# EAGLE board SensorBoards_Combined_Mask_20_01_2018 (EAGLE 8.5.2)
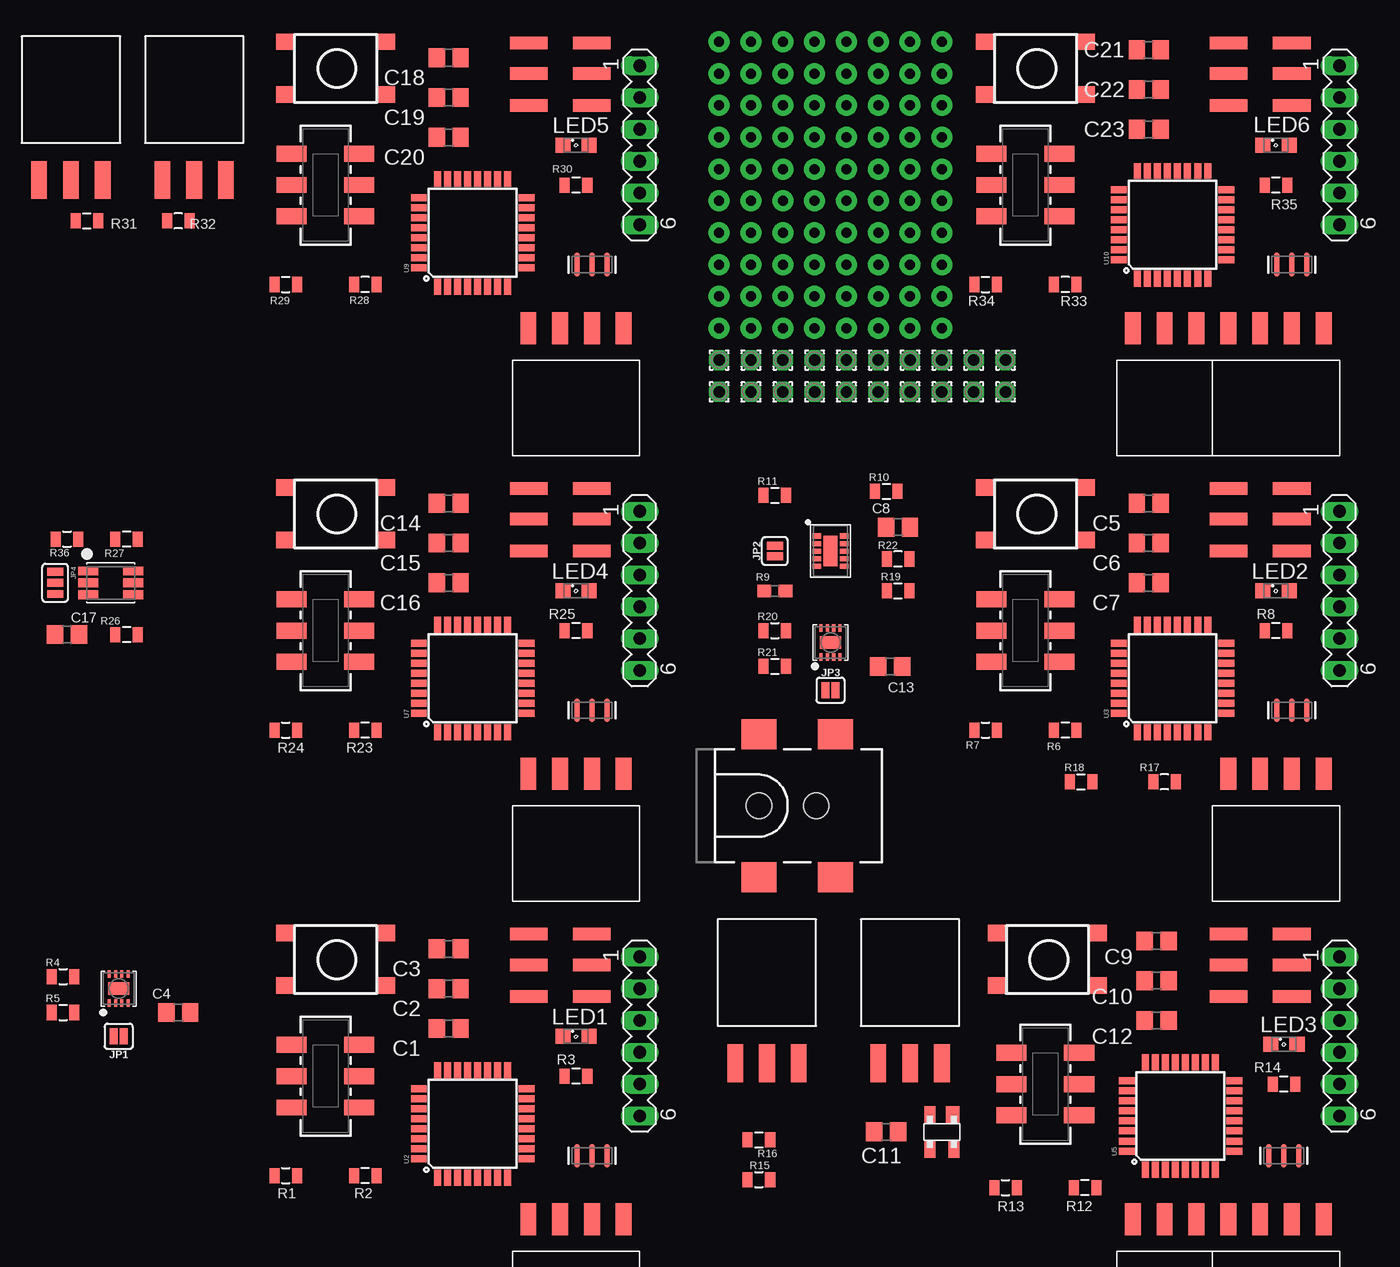
[diagram p0: board, top side]
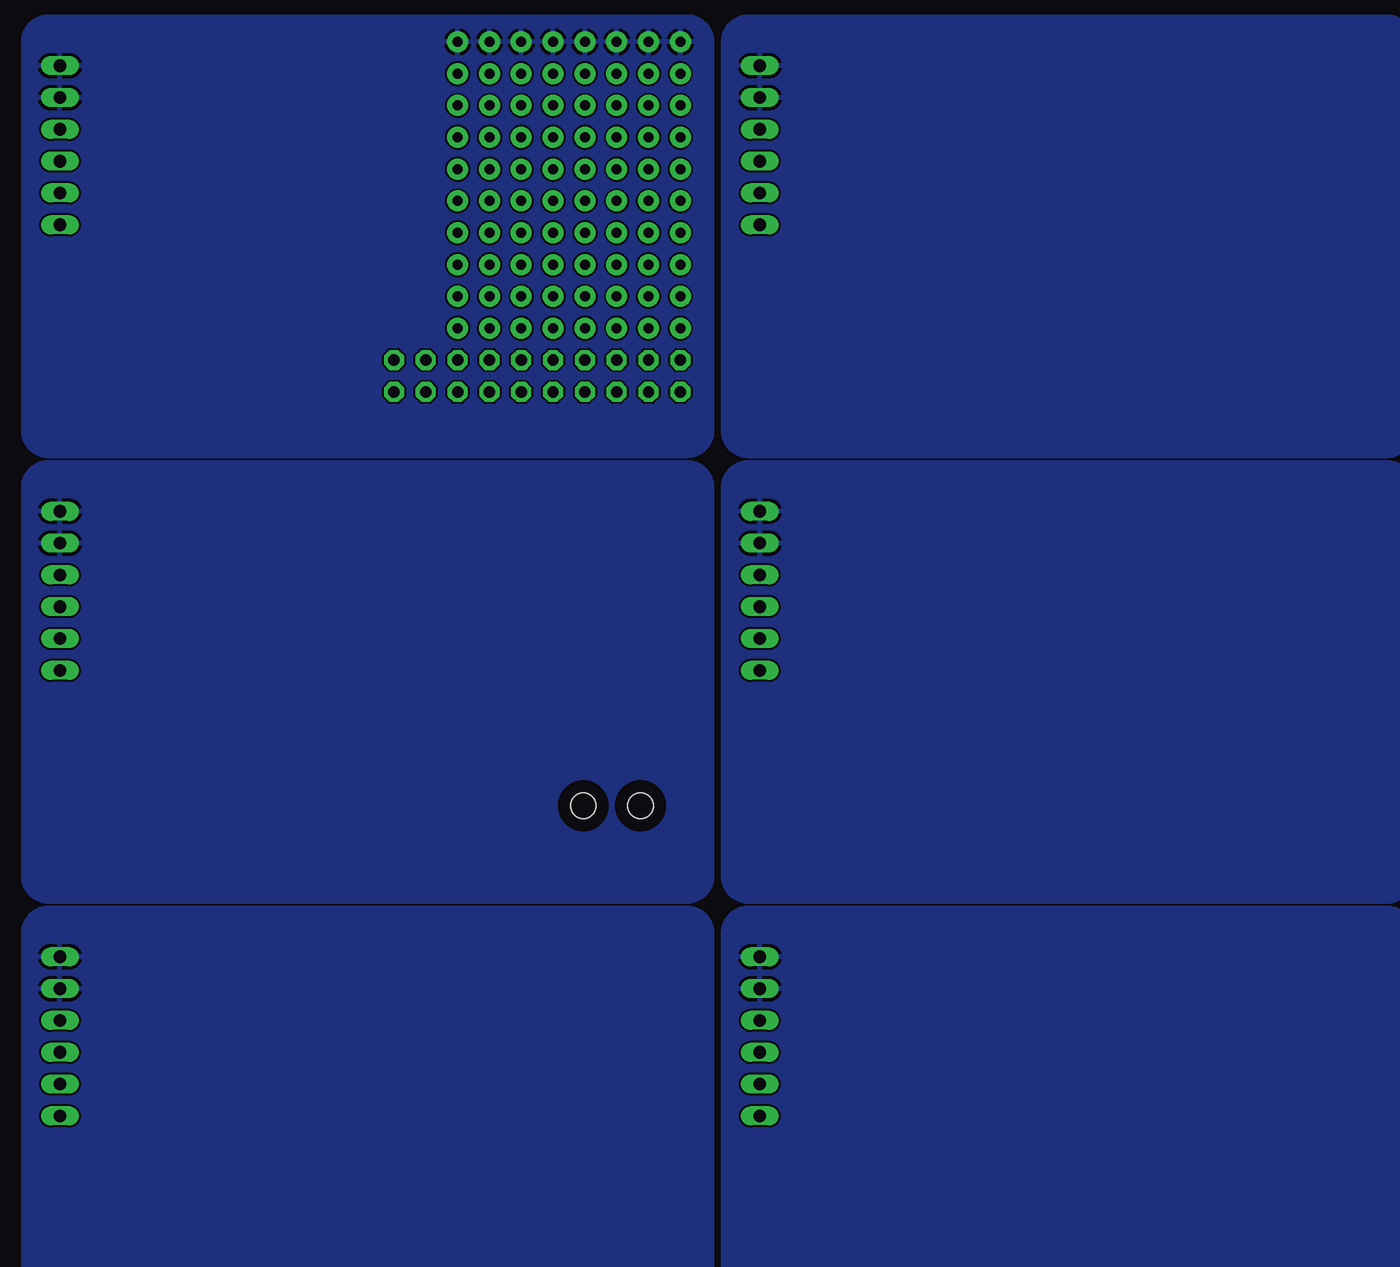
[diagram p1: board, bottom side, seen from below]

No outline drawn. Coordinates in mm, seen from the top.
Copper layers (1*16): Top 0.035mm / dielectric 1.5mm / Bottom 0.035mm
Design rules "default": minimum track width 6mil, minimum drill 0.35mm, track to track 6mil, track to pad 6mil, pad to pad 6mil, via to via 6mil, smd to smd 6mil, copper to edge 40mil, drill to drill 6mil, minimum pad ring 10mil, minimum via ring 8mil, stop-mask expansion 4mil, vias tented up to drill 0mil, thermal gap 10mil
Net classes: 0 default: width 0.3 mm; 1 Vsupply: width 0.5 mm; 5 GND: width 0.5 mm

## Footprints (pad centres in the part's own frame; a part is rotated, then mirrored left to right if it is on the bottom)
C0805 = smd 1.3 x 1.5: 1 -0.95,0; 2 0.95,0
M04_SMD_90 = smd 1.27 x 2.54: 1 0,0; 2 2.54,0; 3 5.08,0; 4 7.62,0
M-2X3 = smd 1 x 3: P$1 0,0; P$2 2.54,0; P$3 4.98,0; P$4 4.98,5.05; P$5 2.54,5.05; P$6 0,5.05
POWER_JACK_SMD = smd 2.8 x 2.4: GND 0,-5.7; P$4 6.1,-5.7; VIN0 0,5.7; VIN1 6.1,5.7 | hole 2.032: 0,0; 4.572,0
1X03_SMD_RA_FEMALE = smd 1.25 x 3: 1 -2.54,7.225; 2 0,7.225; 3 2.54,7.225
SPARKFUN-JUMPERS_SMT-JUMPER_2_NO_SILK = smd 0.635 x 1.27: 1 -0.406,0; 2 0.406,0
MIKE-TEMP_SJ_3 = smd 0.635 x 1.27: 1 -0.889,0; 2 0,0; 3 0.889,0
SML0805 = smd 1.2 x 1.2: A 1.05,0; C -1.05,0
1,6/0,9 = drill 0.914 pad 1.6 octagon: 1 0,0
0805 = smd 0.8 x 1.2: 1 -0.9,0; 2 0.9,0
CCS811_BREAKOUT_TEMP_0603 = smd 1.1 x 1: 1 -0.85,0; 2 0.85,0
M-PUSHBUTTON-SMD = smd 1.55 x 1.3: 1 0,0; 2 7.95,0; 3 0,-4.2; 4 7.95,-4.2
JS202011SCQN = smd 1.27 x 2.4: 1 -2.5,-2.7; 2 0,-2.7; 3 2.5,-2.7; 4 -2.5,2.7; 5 0,2.7; 6 2.5,2.7
MA06-1 = drill 1.016 long: 1 -6.35,0; 2 -3.81,0; 3 -1.27,0; 4 1.27,0; 5 3.81,0; 6 6.35,0
M03_SMD_90 = smd 1.27 x 2.54: 1 0,0; 2 2.54,0; 3 5.08,0
MICROBUILDER_SHT3X = smd 0.6 x 0.25: 1 -1.15,0.75; 2 -1.15,0.25; 3 -1.15,-0.25; 4 -1.15,-0.75; 5 1.15,-0.75; 6 1.15,-0.25; 7 1.15,0.25; 8 1.15,0.75 | smd 1 x 1.7: THERMAL 0,0
TQFP32-08 = smd 1.27 x 0.559: 1 -4.293,2.8; 2 -4.293,2; 3 -4.293,1.2; 4 -4.293,0.4; 5 -4.293,-0.4; 6 -4.293,-1.2; 7 -4.293,-2; 8 -4.293,-2.8; 17 4.293,-2.8; 18 4.293,-2; 19 4.293,-1.2; 20 4.293,-0.4; 21 4.293,0.4; 22 4.293,1.2; 23 4.293,2; 24 4.293,2.8 | smd 0.559 x 1.27: 9 -2.8,-4.293; 10 -2,-4.293; 11 -1.2,-4.293; 12 -0.4,-4.293; 13 0.4,-4.293; 14 1.2,-4.293; 15 2,-4.293; 16 2.8,-4.293; 25 2.8,4.293; 26 2,4.293; 27 1.2,4.293; 28 0.4,4.293; 29 -0.4,4.293; 30 -1.2,4.293; 31 -2,4.293; 32 -2.8,4.293
CCS811_BREAKOUT_TEMP_LGA10 = smd 0.7 x 0.4: 1 -1.1,1.2; 2 -1.1,0.6; 3 -1.1,0; 4 -1.1,-0.6; 5 -1.1,-1.2; 6 1.1,-1.2; 7 1.1,-0.6; 8 1.1,0; 9 1.1,0.6; 10 1.1,1.2 | smd 1.1 x 2.45: EP 0,0
MIKE-TEMP_TMB-6 = smd 1.6 x 0.7: 1 -1.8,0.95; 2 -1.8,0; 3 -1.8,-0.95; 4 1.8,-0.95; 5 1.8,0; 6 1.8,0.95
SOT143 = smd 1.4 x 1.1: GND -1.35,0.86 | smd 1.4 x 0.9: IN -1.35,-0.96; OUT 1.35,-0.96; VCC 1.35,0.96
10X8_PROTOTYPE_AREA = drill 0.8 pad 1.676: P$1 0,0; P$2 2.54,0; P$3 5.08,0; P$4 7.62,0; P$5 10.16,0; P$6 12.7,0; P$7 15.24,0; P$8 17.78,0; P$9 0,-2.54; P$10 2.54,-2.54; P$11 5.08,-2.54; P$12 7.62,-2.54; P$13 10.16,-2.54; P$14 12.7,-2.54; P$15 15.24,-2.54; P$16 17.78,-2.54; P$17 0,-5.08; P$18 2.54,-5.08; P$19 5.08,-5.08; P$20 7.62,-5.08; P$21 10.16,-5.08; P$22 12.7,-5.08; P$23 15.24,-5.08; P$24 17.78,-5.08; P$25 0,-7.62; P$26 2.54,-7.62; P$27 5.08,-7.62; P$28 7.62,-7.62; P$29 10.16,-7.62; P$30 12.7,-7.62; P$31 15.24,-7.62; P$32 17.78,-7.62; P$33 0,-10.16; P$34 2.54,-10.16; P$35 5.08,-10.16; P$36 7.62,-10.16; P$37 10.16,-10.16; P$38 12.7,-10.16; P$39 15.24,-10.16; P$40 17.78,-10.16; P$41 0,-12.7; P$42 2.54,-12.7; P$43 5.08,-12.7; P$44 7.62,-12.7; P$45 10.16,-12.7; P$46 12.7,-12.7; P$47 15.24,-12.7; P$48 17.78,-12.7; P$49 0,-15.24; P$50 2.54,-15.24; P$51 5.08,-15.24; P$52 7.62,-15.24; P$53 10.16,-15.24; P$54 12.7,-15.24; P$55 15.24,-15.24; P$56 17.78,-15.24; P$57 0,-17.78; P$58 2.54,-17.78; P$59 5.08,-17.78; P$60 7.62,-17.78; P$61 10.16,-17.78; P$62 12.7,-17.78; P$63 15.24,-17.78; P$64 17.78,-17.78; P$65 0,-20.32; P$66 2.54,-20.32; P$67 5.08,-20.32; P$68 7.62,-20.32; P$69 10.16,-20.32; P$70 12.7,-20.32; P$71 15.24,-20.32; P$72 17.78,-20.32; P$73 0,-22.86; P$74 2.54,-22.86; P$75 5.08,-22.86; P$76 7.62,-22.86; P$77 10.16,-22.86; P$78 12.7,-22.86; P$79 15.24,-22.86; P$80 17.78,-22.86
RESONATOR-SMD = smd 0.45 x 1.905: 1 -1.2,0; 2 0,0; 3 1.2,0

## Placement (x,y rotation side)
C1  100n  [C0805]  38.1,27.94 180 top
C2  100n  [C0805]  38.1,31.11 180 top
C3  100n  [C0805]  38.1,34.29 180 top
C4  100n  [C0805]  16.51,29.21 180 top
C5  100n  [C0805]  93.98,69.85 180 top
C6  100n  [C0805]  93.98,66.67 180 top
C7  100n  [C0805]  93.98,63.5 180 top
C8  100n  [C0805]  73.98,67.94 180 top
C9  100n  [C0805]  94.61,34.92 180 top
C10  100n  [C0805]  94.61,31.75 180 top
C11  100n  [C0805]  73.03,19.68 180 top
C12  100n  [C0805]  94.61,28.57 180 top
C13  100n  [C0805]  73.34,56.83 180 top
C14  100n  [C0805]  38.1,69.85 180 top
C15  100n  [C0805]  38.1,66.67 180 top
C16  100n  [C0805]  38.1,63.5 180 top
C17  100n  [C0805]  7.62,59.37 0 top
C18  100n  [C0805]  38.1,105.41 180 top
C19  100n  [C0805]  38.1,102.23 180 top
C20  100n  [C0805]  38.1,99.06 180 top
C21  100n  [C0805]  93.98,106.05 180 top
C22  100n  [C0805]  93.98,102.87 180 top
C23  100n  [C0805]  93.98,99.69 180 top
J1  M04_SMD_90  [M04_SMD_90]  44.45,12.7 0 top
J2  ARDUINO_ISP  [M-2X3]  105.41,66.04 90 top
J3  M04_SMD_90  [M04_SMD_90]  100.33,48.26 0 top
J4  ARDUINO_ISP  [M-2X3]  49.53,30.48 90 top
J5  5.5x2.1mm Barrel  [POWER_JACK_SMD]  62.87,45.72 0 top
J6  ARDUINO_ISP  [M-2X3]  49.53,66.04 90 top
J7  M04_SMD_90  [M04_SMD_90]  44.45,48.26 0 top
J8  ARDUINO_ISP  [M-2X3]  49.53,101.6 90 top
J9  1x3 RA Female .1"  [1X03_SMD_RA_FEMALE]  17.78,102.87 180 top
J10  1x3 RA Female .1"  [1X03_SMD_RA_FEMALE]  7.94,102.87 180 top
J11  ARDUINO_ISP  [M-2X3]  105.41,101.6 90 top
J12  M04_SMD_90  [M04_SMD_90]  100.33,83.82 0 top
JP1  [SPARKFUN-JUMPERS_SMT-JUMPER_2_NO_SILK]  11.75,27.3 180 top
JP2  [SPARKFUN-JUMPERS_SMT-JUMPER_2_NO_SILK]  64.14,66.04 90 top
JP3  [SPARKFUN-JUMPERS_SMT-JUMPER_2_NO_SILK]  68.58,54.93 180 top
JP4  [MIKE-TEMP_SJ_3]  6.67,63.5 270 top
LED1  Red  [SML0805]  48.26,27.3 0 top
LED2  Red  [SML0805]  104.14,62.87 0 top
LED3  Red  [SML0805]  104.78,26.67 0 top
LED4  Red  [SML0805]  48.26,62.87 0 top
LED5  Red  [SML0805]  48.26,98.42 0 top
LED6  Red  [SML0805]  104.14,98.42 0 top
PAD1  [1,6/0,9]  72.39,78.74 180 top
PAD2  [1,6/0,9]  74.93,78.74 180 top
PAD3  [1,6/0,9]  59.69,78.74 180 top
PAD4  [1,6/0,9]  62.23,78.74 180 top
PAD5  [1,6/0,9]  77.47,78.74 180 top
PAD6  [1,6/0,9]  80.01,78.74 180 top
PAD7  [1,6/0,9]  64.77,78.74 180 top
PAD8  [1,6/0,9]  67.31,78.74 180 top
PAD9  [1,6/0,9]  69.85,78.74 180 top
PAD10  [1,6/0,9]  72.39,81.28 180 top
PAD11  [1,6/0,9]  74.93,81.28 180 top
PAD12  [1,6/0,9]  59.69,81.28 180 top
PAD13  [1,6/0,9]  62.23,81.28 180 top
PAD14  [1,6/0,9]  77.47,81.28 180 top
PAD15  [1,6/0,9]  80.01,81.28 180 top
PAD16  [1,6/0,9]  64.77,81.28 180 top
PAD17  [1,6/0,9]  67.31,81.28 180 top
PAD18  [1,6/0,9]  69.85,81.28 180 top
PAD19  [1,6/0,9]  82.55,81.28 0 top
PAD20  [1,6/0,9]  82.55,78.74 0 top
R1  10k  [0805]  25.08,16.19 0 top
R2  10k  [0805]  31.43,16.19 180 top
R3  330  [0805]  48.26,24.13 180 top
R4  10k  [0805]  7.3,32.07 0 top
R5  100k  [0805]  7.3,29.21 0 top
R6  10k  [0805]  87.31,51.75 180 top
R7  10k  [0805]  80.96,51.75 0 top
R8  330  [0805]  104.14,59.69 180 top
R9  10k  [CCS811_BREAKOUT_TEMP_0603]  64.14,62.87 180 top
R10  10k  [0805]  73.03,70.8 0 top
R11  100k  [0805]  64.14,70.48 0 top
R12  10k  [0805]  88.9,15.24 180 top
R13  10k  [0805]  82.55,15.24 0 top
R14  330  [0805]  104.78,23.5 180 top
R15  10k  [0805]  62.87,15.88 0 top
R16  10k  [0805]  62.87,19.05 0 top
R17  10k  [0805]  95.25,47.62 180 top
R18  10k  [0805]  88.58,47.62 0 top
R19  10k  [0805]  73.98,62.87 0 top
R20  10k  [0805]  64.14,59.69 0 top
R21  100k  [0805]  64.14,56.83 0 top
R22  100k  [0805]  73.98,65.41 180 top
R23  10k  [0805]  31.43,51.75 180 top
R24  10k  [0805]  25.08,51.75 0 top
R25  330  [0805]  48.26,59.69 180 top
R26  10k  [0805]  12.38,59.37 180 top
R27  10k  [0805]  12.38,66.99 180 top
R28  10k  [0805]  31.43,87.31 180 top
R29  10k  [0805]  25.08,87.31 0 top
R30  330  [0805]  48.26,95.25 180 top
R31  4.7k  [0805]  9.21,92.39 0 top
R32  4.7k  [0805]  16.51,92.39 180 top
R33  10k  [0805]  87.31,87.31 180 top
R34  10k  [0805]  80.96,87.31 0 top
R35  330  [0805]  104.14,95.25 180 top
R36  10k  [0805]  7.62,66.99 0 top
S1  Reset  [M-PUSHBUTTON-SMD]  25.08,35.56 0 top
S2  Reset  [M-PUSHBUTTON-SMD]  80.96,71.12 0 top
S3  JS202011SCQN  [JS202011SCQN]  28.26,24.13 90 top
S4  JS202011SCQN  [JS202011SCQN]  84.14,59.69 90 top
S5  Reset  [M-PUSHBUTTON-SMD]  81.92,35.56 0 top
S6  JS202011SCQN  [JS202011SCQN]  85.72,23.5 90 top
S7  Reset  [M-PUSHBUTTON-SMD]  25.08,71.12 0 top
S8  JS202011SCQN  [JS202011SCQN]  28.26,59.69 90 top
S9  Reset  [M-PUSHBUTTON-SMD]  25.08,106.68 0 top
S10  JS202011SCQN  [JS202011SCQN]  28.26,95.25 90 top
S11  Reset  [M-PUSHBUTTON-SMD]  80.96,106.68 0 top
S12  JS202011SCQN  [JS202011SCQN]  84.14,95.25 90 top
SV1  [MA06-1]  53.34,27.3 270 top
SV2  [MA06-1]  109.22,62.87 270 top
SV3  M03_SMD_90  [M03_SMD_90]  92.71,12.7 0 top
SV4  1x3 RA Female .1"  [1X03_SMD_RA_FEMALE]  74.93,32.38 180 top
SV5  1x3 RA Female .1"  [1X03_SMD_RA_FEMALE]  63.5,32.38 180 top
SV6  ARDUINO_ISP  [M-2X3]  105.41,30.48 90 top
SV7  M04_SMD_90  [M04_SMD_90]  100.33,12.7 0 top
SV8  [MA06-1]  109.22,27.3 270 top
SV9  [MA06-1]  53.34,62.87 270 top
SV10  [MA06-1]  53.34,98.42 270 top
SV11  [MA06-1]  109.22,98.42 270 top
U1  [MICROBUILDER_SHT3X]  11.75,31.11 90 top
U2  ATMEGA328P_TQFP  [TQFP32-08]  40.01,20.32 90 top
U3  ATMEGA328P_TQFP  [TQFP32-08]  95.89,55.88 90 top
U4  CCS811  [CCS811_BREAKOUT_TEMP_LGA10]  68.58,66.04 0 top
U5  ATMEGA328P_TQFP  [TQFP32-08]  96.52,20.95 90 top
U6  [MICROBUILDER_SHT3X]  68.58,58.74 90 top
U7  ATMEGA328P_TQFP  [TQFP32-08]  40.01,55.88 90 top
U8  MIKE-TEMP_TSL2561T  [MIKE-TEMP_TMB-6]  11.11,63.5 0 top
U9  ATMEGA328P_TQFP  [TQFP32-08]  40.01,91.44 90 top
U10  ATMEGA328P_TQFP  [TQFP32-08]  95.89,92.08 90 top
U$1  M04_SMD_90  [M04_SMD_90]  44.45,83.82 0 top
U$2  MAX6816EUS  [SOT143]  77.47,19.68 270 top
U$3  M03_SMD_90  [M03_SMD_90]  92.71,83.82 0 top
U$4  10X8_PROTOTYPE_AREA  [10X8_PROTOTYPE_AREA]  59.69,106.68 0 top
Y1  8MHZ  [RESONATOR-SMD]  49.53,17.78 180 top
Y2  8MHZ  [RESONATOR-SMD]  105.41,53.34 180 top
Y3  8MHZ  [RESONATOR-SMD]  104.78,17.78 180 top
Y4  8MHZ  [RESONATOR-SMD]  49.53,53.34 180 top
Y5  8MHZ  [RESONATOR-SMD]  49.53,88.9 180 top
Y6  8MHZ  [RESONATOR-SMD]  105.41,88.9 180 top

## Library data of the parts
C1-C23 = eagle-ltspice; SPICEMODEL: NONE; SPICEPREFIX: C
J1 J3 J7 J12 S3 S4 S6 S8 S10 S12 SV3 SV7 U$1-U$4 = myownthings
J2 J4 J6 J8 J11 S1 S2 S5 S7 S9 S11 SV6 = marc_library
J5 = wsn; PROD_ID: CONN-08106; SF_ID: PRT-12748
J9 J10 SV4 SV5 = SparkFun-Connectors; PROD_ID: CONN-10926
JP1-JP3 = SparkFun_CSS811_Breakout
JP4 U8 = TSL2561 Luminosity Sensor BOB
LED1-LED6 = led
PAD1-PAD20 = wirepad
R1-R8 R10-R36 = SparkFun-Passives
R9 = SparkFun_CSS811_Breakout; PROD_ID: RES-13608
SV1 SV2 SV8-SV11 = con-lstb; OC_FARNELL: unknown; OC_NEWARK: unknown
U1 U6 = Adafruit SHT31 Breakout
U2 U3 U5 U7 U9 U10 = marc_library; PROD_ID: IC-09069
U4 = SparkFun_CSS811_Breakout; PROD_ID: IC-13607
Y1-Y6 = marc_library; PROD_ID: XTAL-08895

## Nets
+5V: PAD19.1 PAD20.1 U$3.3
ADC6: PAD3.1 PAD12.1 U10.19
ADC7: PAD4.1 PAD13.1 U10.22
AUX: R9.1 R19.1 U4.8
DBG_ENABLE: R1.2 U2.26
DBG_ENABLE1: R7.2 U3.26
DBG_ENABLE2: R13.2 U5.26
DBG_ENABLE3: R24.2 U7.26
DBG_ENABLE4: R29.2 U9.26
DBG_ENABLE5: R34.2 U10.26
DIGITAL_INPUT_1: U5.32 U$2.OUT
DIGITAL_INPUT_2: R15.1 R16.1 SV5.2 U5.1
DS18B20_DATA_1: J10.2 R31.1 U9.32
DS18B20_DATA_2: J9.2 R32.1 U9.1
FTDI_RESET: C1.1 SV1.6
FTDI_RESET1: C7.1 SV2.6
FTDI_RESET2: C12.1 SV8.6
FTDI_RESET3: C16.1 SV9.6
FTDI_RESET4: C20.1 SV10.6
FTDI_RESET5: C23.1 SV11.6
FTDI_RXI: SV1.4 U2.30
FTDI_RXI1: SV2.4 U3.30
FTDI_RXI2: SV8.4 U5.30
FTDI_RXI3: SV9.4 U7.30
FTDI_RXI4: SV10.4 U9.30
FTDI_RXI5: SV11.4 U10.30
FTDI_TXO: SV1.5 U2.31
FTDI_TXO1: SV2.5 U3.31
FTDI_TXO2: SV8.5 U5.31
FTDI_TXO3: SV9.5 U7.31
FTDI_TXO4: SV10.5 U9.31
FTDI_TXO5: SV11.5 U10.31
GND [GND]: C2.2 C3.2 C4.2 J1.4 J4.P$5 JP1.1 LED1.C S1.1 S1.2 S3.3 SV1.1 SV1.2 U1.7 U1.8 U1.THERMAL U2.3 U2.5 U2.21 Y1.2
GND1 [GND]: C5.2 C6.2 C8.2 C13.2 J2.P$5 J3.4 J5.GND J5.P$4 JP2.1 JP3.1 LED2.C R22.1 S2.1 S2.2 S4.3 SV2.1 SV2.2 U3.3 U3.5 U3.21 U4.EP U6.7 U6.8 U6.THERMAL Y2.2
GND2 [GND]: C9.2 C10.2 LED3.C R15.2 S5.1 S5.2 S6.3 SV4.1 SV5.3 SV6.P$5 SV7.4 SV8.1 SV8.2 U5.3 U5.5 U5.21 U$2.GND Y3.2
GND3 [GND]: C14.2 C15.2 C17.1 J6.P$5 J7.4 JP4.3 LED4.C S7.1 S7.2 S8.3 SV9.1 SV9.2 U7.3 U7.5 U7.21 U8.3 Y4.2
GND4 [GND]: C18.2 C19.2 J8.P$5 J9.1 J10.1 LED5.C S9.1 S9.2 S10.3 SV10.1 SV10.2 U9.3 U9.5 U9.21 U$1.4 Y5.2
GND5 [GND]: C21.2 C22.2 J11.P$5 J12.4 LED6.C S11.1 S11.2 S12.3 SV11.1 SV11.2 U10.3 U10.5 U10.21 U$3.1 U$4.P$1 U$4.P$2 U$4.P$3 U$4.P$4 U$4.P$5 U$4.P$6 U$4.P$7 U$4.P$8 Y6.2
INT0: PAD6.1 PAD15.1 U10.32
INT1: U10.1
INT_TO_COM: SV3.1 U5.2
L1: R3.2 U2.14
L2: R8.2 U3.14
L3: R14.2 U5.14
L4: R25.2 U7.14
L5: R30.2 U9.14
L6: R35.2 U10.14
MCU_RXI: J1.3 U2.11
MCU_RXI1: J3.3 U3.11
MCU_RXI2: SV7.3 U5.11
MCU_RXI3: J7.3 U7.11
MCU_RXI4: U9.11 U$1.3
MCU_RXI5: J12.3 U10.11
MCU_TXO: J1.2 U2.10
MCU_TXO1: J3.2 U3.10
MCU_TXO2: SV7.2 U5.10
MCU_TXO3: J7.2 U7.10
MCU_TXO4: U9.10 U$1.2
MCU_TXO5: J12.2 U10.10
MISO: J4.P$1 U2.16
MISO1: J2.P$1 U3.16
MISO2: SV6.P$1 U5.16
MISO3: J6.P$1 U7.16
MISO4: J8.P$1 U9.16
MISO5: J11.P$1 U10.16
MOSI: J4.P$3 U2.15
MOSI1: J2.P$3 U3.15
MOSI2: SV6.P$3 U5.15
MOSI3: J6.P$3 U7.15
MOSI4: J8.P$3 U9.15
MOSI5: J11.P$3 U10.15
N$1: U2.8 Y1.3
N$2: U2.7 Y1.1
N$3: R1.1 S3.2
N$4: R4.1 U1.6
N$5: JP1.2 R5.1 U1.2
N$6: U3.8 Y2.3
N$7: U3.7 Y2.1
N$8: LED2.A R8.1
N$9: C5.1 U3.20
N$10: R7.1 S4.2
N$11: JP2.2 R11.1 U4.1
N$12: R20.1 U6.6
N$13: U5.8 Y3.3
N$14: U5.7 Y3.1
N$15: C3.1 U2.20
N$16: LED3.A R14.1
N$17: C9.1 U5.20
N$18: SV4.2 U$2.IN
N$19: R13.1 S6.2
N$20: JP3.2 R21.1 U6.2
N$21: R22.2 U4.7
N$22: U7.8 Y4.3
N$23: U7.7 Y4.1
N$24: LED4.A R25.1
N$25: C14.1 U7.20
N$26: R24.1 S8.2
N$27: JP4.1 R36.1
N$28: U9.8 Y5.3
N$29: U9.7 Y5.1
N$30: LED1.A R3.1
N$31: LED5.A R30.1
N$32: C18.1 U9.20
N$33: R29.1 S10.2
N$34: U10.8 Y6.3
N$35: U10.7 Y6.1
N$36: LED6.A R35.1
N$37: C21.1 U10.20
N$38: R34.1 S12.2
N$39: JP4.2 U8.2
NTC_SENSE: R9.2 U4.4 U4.5
PC0: PAD7.1 PAD16.1 U10.23
PC1: PAD8.1 PAD17.1 U10.24
PC2: PAD9.1 PAD18.1 U10.25
RESET: C1.2 J4.P$4 R2.1 S1.3 S1.4 U2.29
RESET1: C7.2 J2.P$4 R6.1 S2.3 S2.4 U3.29
RESET2: C12.2 R12.1 S5.3 S5.4 SV6.P$4 U5.29
RESET3: C16.2 J6.P$4 R23.1 S7.3 S7.4 U7.29
RESET4: C20.2 J8.P$4 R28.1 S9.3 S9.4 U9.29
RESET5: C23.2 J11.P$4 R33.1 S11.3 S11.4 U10.29
SCK: J4.P$2 U2.17
SCK1: J2.P$2 U3.17
SCK2: SV6.P$2 U5.17
SCK3: J6.P$2 U7.17
SCK4: J8.P$2 U9.17
SCK5: J11.P$2 U10.17
SCL: U1.4 U2.28
SCL1: R18.1 U3.28 U4.10 U6.4
SCL2: R26.1 U7.28 U8.4
SCL3: PAD2.1 PAD11.1 U10.28
SDA: U1.1 U2.27
SDA1: R17.1 U3.27 U4.9 U6.1
SDA2: R27.1 U7.27 U8.6
SDA3: PAD1.1 PAD10.1 U10.27
SENS_RES: R10.1 U4.2
VCC [Vsupply]: C2.1 C4.1 J1.1 J4.P$6 R2.2 R4.2 R5.2 S3.1 SV1.3 U1.5 U2.4 U2.6 U2.18
VCC1 [Vsupply]: C6.1 C8.1 C13.1 J2.P$6 J3.1 J5.VIN0 J5.VIN1 R6.2 R10.2 R11.2 R17.2 R18.2 R19.2 R20.2 R21.2 S4.1 SV2.3 U3.4 U3.6 U3.18 U4.6 U6.5
VCC2 [Vsupply]: C10.1 R12.2 R16.2 S6.1 SV5.1 SV6.P$6 SV7.1 SV8.3 U5.4 U5.6 U5.18
VCC3 [Vsupply]: C15.1 C17.2 J6.P$6 J7.1 R23.2 R26.2 R27.2 R36.2 S8.1 SV9.3 U7.4 U7.6 U7.18 U8.1
VCC4 [Vsupply]: C19.1 J8.P$6 J9.3 J10.3 R28.2 R31.2 R32.2 S10.1 SV10.3 U9.4 U9.6 U9.18 U$1.1
VCC5 [Vsupply]: C22.1 J11.P$6 J12.1 PAD5.1 PAD14.1 R33.2 S12.1 SV11.3 U10.4 U10.6 U10.18 U$3.2
VDD [Vsupply]: C11.1 SV3.2 U$2.VCC

## Tracks (layer width: path | path; a pad name or v marks a point on that pad's centre or on a via)
GND
  pour Bottom: 56.27,35.54 56.27,4.54 arc-90 54.27,2.54 3.27,2.54 arc-90 1.27,4.54 1.27,35.54 arc-90 3.27,37.54 54.27,37.54 arc-90
GND1
  pour Bottom: 112.15,71.1 112.15,40.1 arc-90 110.15,38.1 59.15,38.1 arc-90 57.15,40.1 57.15,71.1 arc-90 59.15,73.1 110.15,73.1 arc-90
GND2
  pour Bottom: 112.15,35.54 112.15,4.54 arc-90 110.15,2.54 59.15,2.54 arc-90 57.15,4.54 57.15,35.54 arc-90 59.15,37.54 110.15,37.54 arc-90
GND3
  pour Bottom: 56.27,71.1 56.27,40.1 arc-90 54.27,38.1 3.27,38.1 arc-90 1.27,40.1 1.27,71.1 arc-90 3.27,73.1 54.27,73.1 arc-90
GND4
  pour Bottom: 56.27,106.66 56.27,75.66 arc-90 54.27,73.66 3.27,73.66 arc-90 1.27,75.66 1.27,106.66 arc-90 3.27,108.66 54.27,108.66 arc-90
GND5
  pour Bottom: 112.15,106.66 112.15,75.66 arc-90 110.15,73.66 59.15,73.66 arc-90 57.15,75.66 57.15,106.66 arc-90 59.15,108.66 110.15,108.66 arc-90